# Altium PCB pcb of one chennel relay.PcbDoc
Units mil, origin at the board's own origin, x right, y up, seen from the top; angles counter-clockwise.
Board outline 980 x 2910 mil, 2 copper layers (Top Layer, Bottom Layer); 9 components, 11 nets, 26 pads, 0 vias.
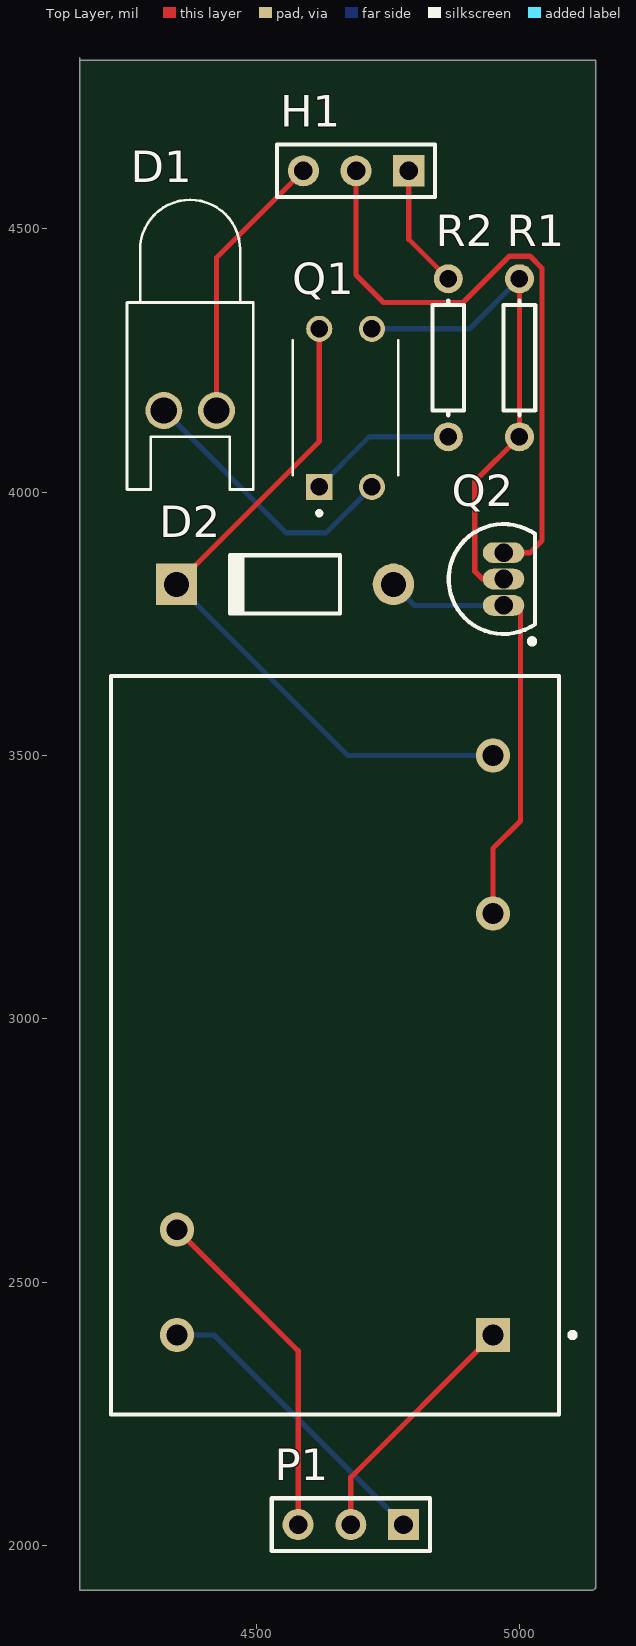
[diagram p0: Top Layer view]
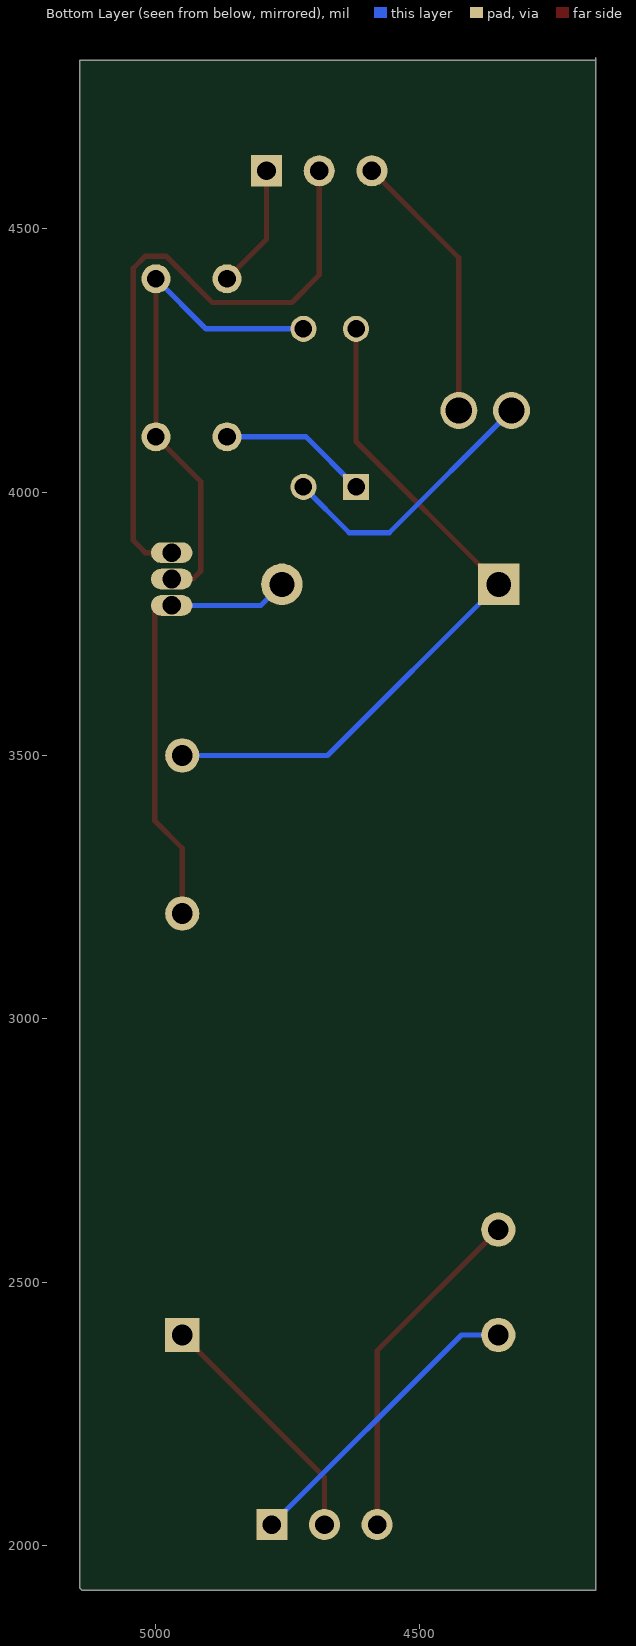
[diagram p1: Bottom Layer view, seen from below]

## Layer stack, top to bottom
Top Solder: solder mask 0.4, Solder Resist, Dk 3.5
Top Layer: signal copper 1.4
Dielectric 1: dielectric 12.6, FR-4, Dk 4.8
Bottom Layer: signal copper 1.4
Bottom Solder: solder mask 0.4, Solder Resist, Dk 3.5

## Board outline
4165,4820 5145,4820 5145,1920 5140,1915 4165,1915 4165,4825

## Design rules (kind name [scope] priority, off if disabled: settings)
Clearance [All] p1: gap=10 ignorepadtopadclearanceinfootprint=FALSE
PolygonConnect [All] p1: connectstyle=Relief reliefconductorwidth=10 reliefentries=4 polygonreliefangle="90 Angle" airgapwidth=10
RoutingVias [All] p1: holewidth=28 width=50 viastyle="Through Hole" minholewidth=28 minwidth=50 maxholewidth=28 maxwidth=50
SolderMaskExpansion [All] p1: expansion=4 istentingtop=FALSE
Width [All] p1: maxlimit=10 minlimit=10 preferedwidth=10
30 further rules are at their usual default settings.

## Components (designator, comment, footprint, x,y, rotation, side; value= is the part's Value field where it differs from the comment)
D1 "LED0" LED-0 4375,4155 r180 top
D2 "Diode 1N4007" DO-41 4555,3825 r180 top
H1 "Connector" HDR1X3 4790,4610 r180 top
K1 "Relay" MODULE5B 4650,2950 r90 top
P1 "Header 3" HDR1X3 4780,2040 r180 top
Q1 "PC817C" PC817-DIP 4670,4160 r90 top
Q2 "BC547" TO-226-AA 4970,3835 r0 top
R1 "" AXIAL-0.3 5000,4255 r90 top value=1K
R2 "" AXIAL-0.3 4865,4255 r270 top value=1K

## Footprints (in the part's own frame and the unit in brackets; to place one, negate y for a bottom-side part, rotate by r counter-clockwise, add the part's x,y. Pads: shape width x height; smd on the part's side, far side on the other; paste and mask are expansions set on the pad)
AXIAL-0.3 [mm] "Axial Device, Thru-Hole; 2 Leads; 0.3 in Pin Spacing"
  round 1.4 hole 0.85: 1(-3.81,0) 2(3.81,0)
  silkscreen extent -2.77,-0.76 2.77,0.76
DO-41 [mm] "Diode, Axial; Body 5.2 x 2.7 mm (LxDia. max), Lead Dia. 0.86 mm (max)"
  round 2 hole 1.2: 1(-5.23,0)
  rect 2x2 hole 1.2: 2(5.23,0)
  silkscreen extent -2.65,-1.4 2.75,1.4
HDR1X3 [mm] "Connector; Header; 3 Position"
  rect 1.5x1.5 hole 0.9: 1(0,0)
  round 1.5 hole 0.9: 2(2.54,0) 3(5.08,0)
  silkscreen extent -1.27,-1.27 6.35,1.27
LED-0 [mil] "LED; 2 Leads"
  round 70 hole 50: 1(50,0) 2(-50,0)
  silkscreen extent -120,-400 120,150
MODULE5B [mm] "DIP; 5 Round Pins; Row Space 15.24 mm; Pitch 2.54 mm"
  rect 1.65x1.65 hole 1: 1(-13.97,-7.62)
  round 1.65 hole 1: 2(-13.97,7.62) 3(-8.89,7.62) 4(13.97,-7.62) 5(6.35,-7.62)
  silkscreen extent -17.8,-11.58 17.8,10.8, body extent -17.8,-10.8 17.8,10.8, height 14
PC817-DIP [mm]
  rect 1.26x1.26 hole 0.85: 1(-3.81,1.27)
  round 1.26 hole 0.85: 2(-3.81,-1.27) 3(3.81,-1.27) 4(3.81,1.27)
  silkscreen extent -5.18,-2.54 3.25,2.54, body extent -3.81,-2.16 4.07,2.42, height 4.8
TO-226-AA [mm] "TO, Flat Index; 3 In-Line, Axial Leads; Body Dia. 4.8mm; Leads 0.55 x 0.51 mm (max)"
  oval 2x1 hole 0.9: 1(0,-1.27) 2(0,0) 3(0,1.27)
  silkscreen extent -2.65,-3.13 1.52,2.65, body extent -2.65,-2.66 1.52,2.66, height 5.33

## Part data
D1: "Typical INFRARED GaAs LED", LatestRevisionDate=08-Jul-2005, LatestRevisionNote="Mech Layer 1 removed.", PackageDescription="LED; 2 Leads", PackageReference=LED-0, Published=8-Jun-2000, Publisher="Altium Limited"
D2: "1 Amp General Purpose Rectifier", Code_JEDEC=DO-204-AL, ComponentLink1Description="Manufacturer Link", ComponentLink1URL=http://www.fairchildsemi.com/, ComponentLink2Description=Datasheet, ComponentLink2URL=http://www.fairchildsemi.com/ds/1N%2F1N4001.pdf, DatasheetVersion=1998, LatestRevisionDate=17-Jul-2002, LatestRevisionNote="Re-released for DXP Platform.", PackageDescription="Diode, Axial; Body 5.2 x 2.7 mm (LxDia. max), Lead Dia. 0.86 mm (max)", PackageReference=DO-41, PackageVersion=Aug-1999, Published=8-Jun-2000, Publisher="Altium Limited"
H1: library part "Header 3", "Header, 3-Pin", LatestRevisionDate=17-Jul-2002, LatestRevisionNote="Re-released for DXP Platform.", Publisher="Altium Limited"
K1: "SPDT Relay", LatestRevisionDate=17-Jul-2002, LatestRevisionNote="Re-released for DXP Platform.", PackageReference=MODULE5B, Published=8-Jun-2000, Publisher="Altium Limited"
P1: "Header, 3-Pin", LatestRevisionDate=17-Jul-2002, LatestRevisionNote="Re-released for DXP Platform.", Publisher="Altium Limited"
Q1: "Optoisolator Transistor Output 5000Vrms 1 Channel 4-DIP", Package="DIP-4 Taiwan Semiconductor", Availability=Unavailable, MF="Taiwan Semiconductor", MP=PC817C, Price=None, SnapEDA_Link=https://www.snapeda.com/parts/PC817C/Taiwan%20Semiconductor%20Corporation/view-part/2816187/?ref=snap
Q2: library part NPN, "NPN Bipolar Transistor", Code_JEDEC=TO-226-AA, LatestRevisionDate=17-Jul-2002, LatestRevisionNote="Re-released for DXP Platform.", PackageDescription="TO, Flat Index; 3 In-Line, Axial Leads; Body Dia. 4.8mm; Leads 0.55 x 0.51 mm (max)", PackageReference=TO-226-AA, Published=8-Jun-2000, Publisher="Altium Limited"
R1 R2: library part Res1, "Resistor", LatestRevisionDate=17-Jul-2002, LatestRevisionNote="Re-released for DXP Platform.", PackageDescription="Axial Device, Thru-Hole; 2 Leads; 0.3 in Pin Spacing", PackageReference=AXIAL-0.3, Published=8-Jun-2000, Publisher="Altium Limited"

## Nets (pads, with @x,y where several pads share a name; then routed paths per layer and width w, separated by ;. In a path a pad name is that pad's centre, name@x,y a point inside that pad or via, vN(x,y) a via of type N, cw(c..) or ccw(c..) an arc to the next point about the centre after c; other vN are vias at no path point)
GND: H1.2 Q2.3 | length 1218
  Top Layer w10: H1.2 4690,4412 4742,4360 4893,4360 4981,4448 5020,4448 5043,4425 5043,3908 5020,3885 Q2.3
NetD1_1: D1.1 Q1.2 | length 527.1
  Bottom Layer w10: D1.1 4557,3923 4633,3923 Q1.2
NetD1_2: D1.2 H1.3 | length 523.3
  Top Layer w10: D1.2 4425,4445 H1.3
NetD2_1: D2.1 K1.5 Q2.1 | length 864.2
  Top Layer w10: K1.5 4950,3324 5002,3376 5002,3785 Q2.1
  Bottom Layer w10: D2.1 4800.91,3785 Q2.1
NetD2_2: D2.2 K1.4 Q1.4 | length 1332.7
  Top Layer w10: D2.2 4620,4095.91 Q1.4
  Bottom Layer w10: D2.2 4674.09,3500 K1.4
NetH1_1: H1.1 R2.1 | length 236.1
  Top Layer w10: H1.1 4790,4480 R2.1
NetK1_1: K1.1 P1.2 | length 471.8
  Top Layer w10: P1.2 4680,2130 K1.1
NetK1_2: K1.2 P1.1 | length 579.1
  Bottom Layer w10: K1.2 4420,2400 P1.1
NetK1_3: K1.3 P1.3 | length 655.3
  Top Layer w10: K1.3 4580,2370 P1.3
NetQ1_1: Q1.1 R2.2 | length 284.4
  Bottom Layer w10: Q1.1 4715,4105 R2.2
NetQ1_3: Q1.3 Q2.2 R1.1 R1.2 | length 970.8
  Top Layer w10: Q2.2 4930,3835 4915,3850 4915,4020 R1.1 R1.2
  Bottom Layer w10: Q1.3 4905,4310 R1.2